# Altium PCB DIOT_Sampler 20spacin.PCBDOC (part 4 of 8)
Units mm, origin at the board's own origin, x right, y up, seen from the top; angles counter-clockwise.
Board outline 222.37 x 100 mm, 4 copper layers (Top, GP1(GND), L3, Bot), stack 1.648 mm thick; 680 components, 424 nets, 2212 pads, 808 vias.
Unrouted connection lines stored in the file: 327.
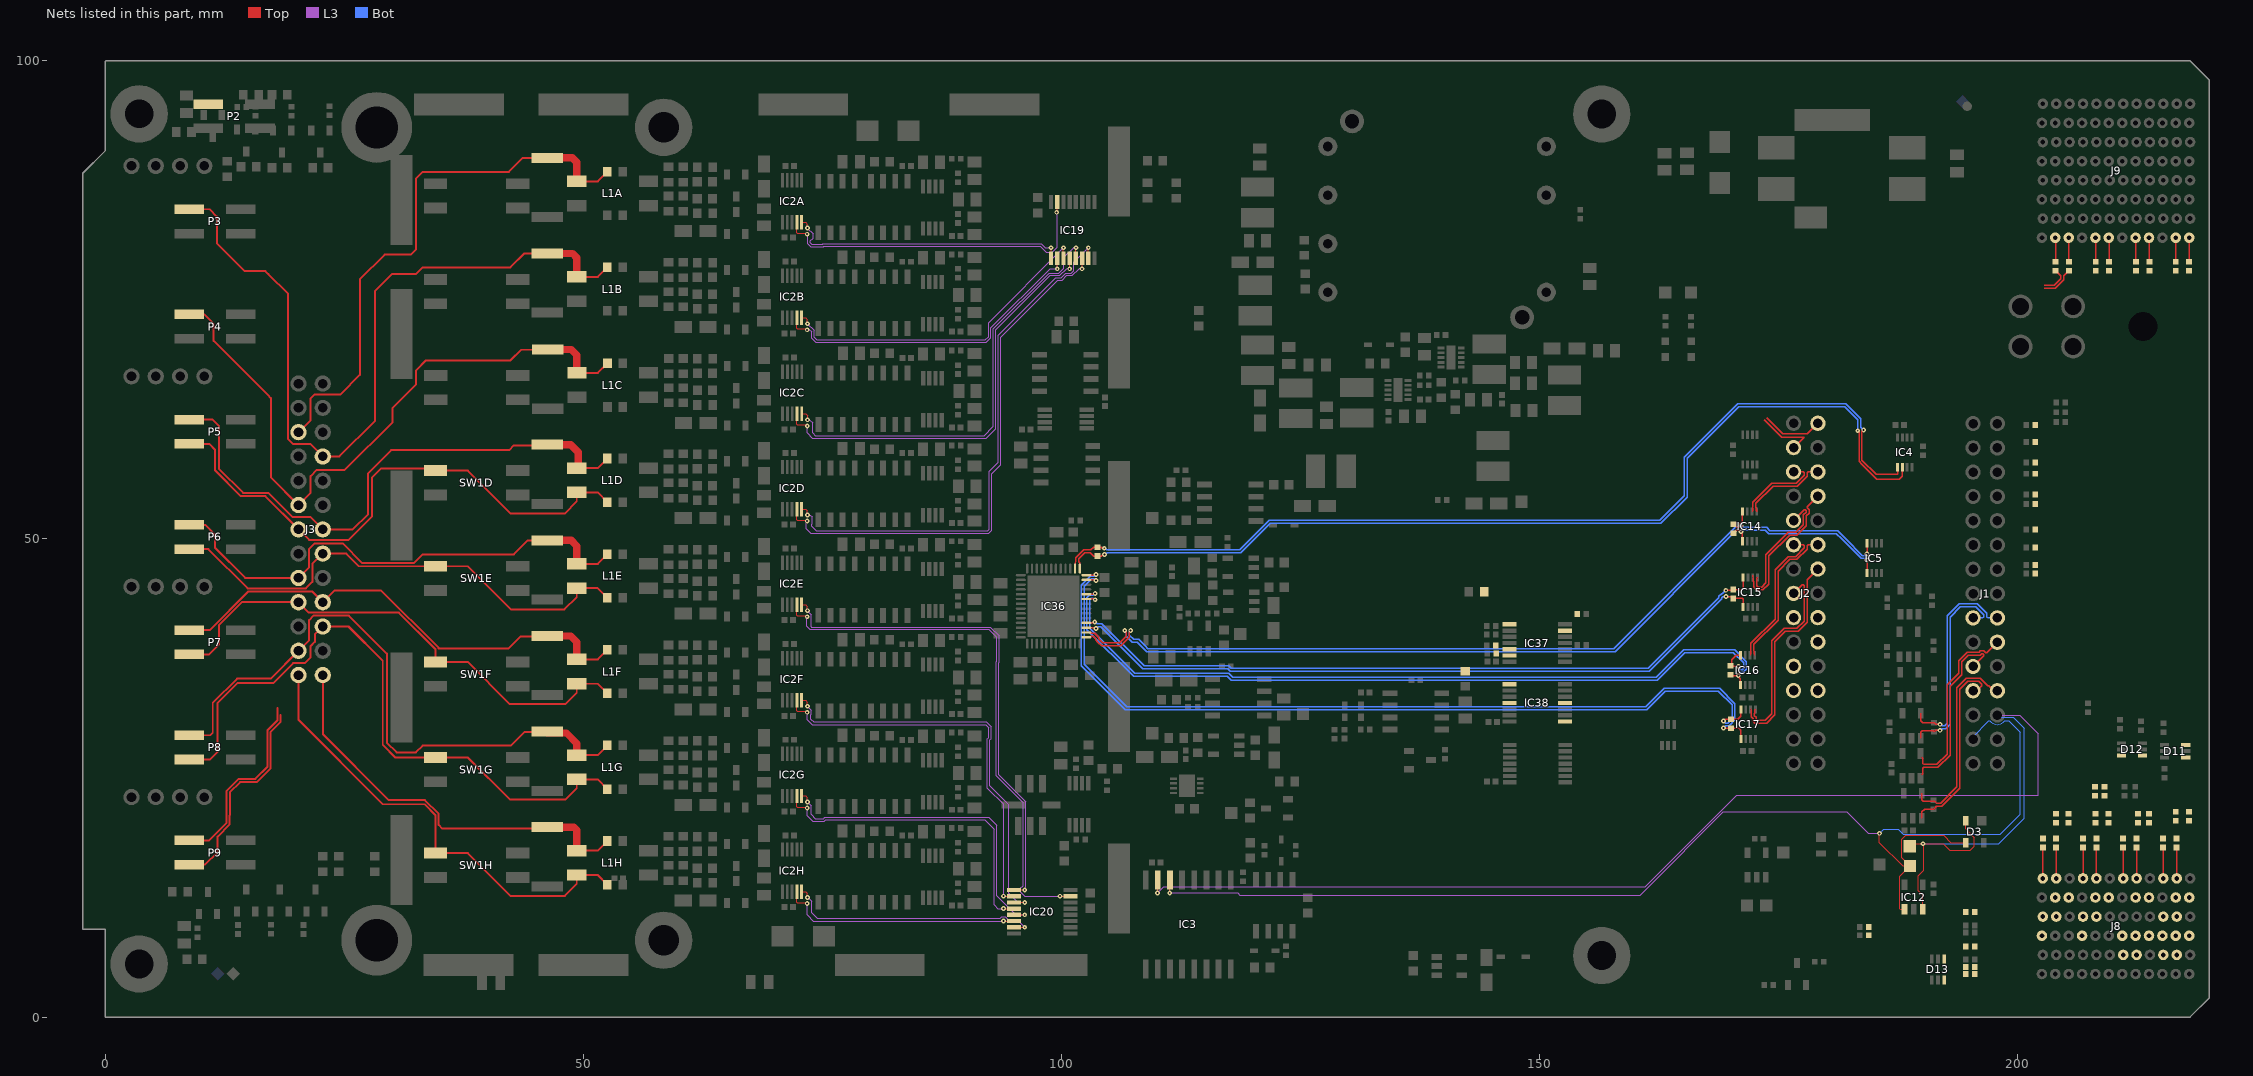
[diagram p5: the nets of this part, all layers, seen from the top]

## Via types
v1: diameter 0.5, hole 0.2, Top to Bot, tented both sides, 765 vias
v2: diameter 0.6, hole 0.3, Top to Bot, tented both sides, 17 vias
v3: diameter 0.5, hole 0.2, Top to Bot, 11 vias
v4: diameter 1, hole 0.6, Top to Bot, tented both sides, 7 vias
v5: diameter 0.6, hole 0.3, Top to Bot, 6 vias
v6: diameter 1.27, hole 0.711, Top to Bot, 2 vias

## Nets (pads, with @x,y where several pads share a name; then routed paths per layer and width w, separated by ;. In a path a pad name is that pad's centre, name@x,y a point inside that pad or via, vN(x,y) a via of type N, cw(c..) or ccw(c..) an arc to the next point about the centre after c; other vN are vias at no path point) (continued)
ADC_IN_N3: J3.14 L1D.2 P5.3 R8D.1 SW1D.1 | length 58.5
  Top w0.203: P5.3@8.8,59.93 10.9,59.93 11.5,59.33 11.5,57.165 14.192,54.473 16.757,54.473 J3.14@20.23,51 21.33,49.9 25.482,49.9 27.9,52.318 27.9,56.416 28.864,57.38 33.743,57.38 33.983,57.14 SW1D.1@34.556,57.14 37.936,57.14 42.421,52.655 48.062,52.655 49.33,53.923 L1D.2@49.33,54.854 51.518,54.854 R8D.1@52.534,53.838
ADC_IN_N4: J3.11 L1E.2 P6.3 R8E.1 SW1E.1 | length 52.3
  Top w0.203: P6.3@8.8,48.93 10.8,48.93 14.9,44.83 21.011,44.83 21.691,45.51 21.691,47.381 J3.11@22.77,48.46 25.231,48.46 26.552,47.14 SW1E.1@34.556,47.14 37.936,47.14 42.446,42.63 48.037,42.63 49.33,43.923 L1E.2@49.33,44.854 51.518,44.854 R8E.1@52.534,43.838
ADC_IN_N5: J3.8 L1F.2 P7.3 R8F.1 SW1F.1 | length 54.2
  Top w0.203: P7.3@8.8,37.93 10.9,37.93 11.9,38.93 11.9,40.974 14.306,43.38 J3.8@20.23,43.38 21.31,42.3 30.719,42.3 34.556,38.463 SW1F.1@34.556,37.14 37.936,37.14 42.346,32.73 48.137,32.73 49.33,33.923 L1F.2@49.33,34.854 51.518,34.854 R8F.1@52.534,33.838
ADC_IN_N6: J3.5 L1G.2 P8.3 R8G.1 SW1G.1 | length 68.1
  Top w0.203: P8.3@8.8,26.93 10.939,26.93 11.764,27.755 11.764,32.85 13.824,34.91 17.574,34.91 19.664,37 20.88,37 21.5,37.62 21.5,38.8 21.938,39.238 21.938,40.009 J3.5@22.77,40.84 25.46,40.84 29.039,37.261 29.039,28.455 30.354,27.14 SW1G.1@34.556,27.14 37.936,27.14 42.321,22.755 48.162,22.755 49.33,23.923 L1G.2@49.33,24.854 51.518,24.854 R8G.1@52.534,23.838
ADC_IN_N7: J3.2 L1H.2 P9.3 R8H.1 SW1H.1 | length 70.4
  Top w0.203: P9.3@8.8,15.93 10.444,15.93 11.764,17.25 11.764,18.878 13.023,20.137 13.023,21.09 13.046,21.113 13.046,23.488 14.128,24.57 15.851,24.57 17.319,26.038 17.319,29.833 18.358,30.872 18.358,31.6 ; J3.2@20.23,35.76 20.23,31.073 29.048,22.255 33.414,22.255 34.556,21.113 SW1H.1@34.556,17.14 37.936,17.14 42.396,12.68 48.087,12.68 49.33,13.923 L1H.2@49.33,14.854 51.518,14.854 R8H.1@52.534,13.838
ADC_IN_P0: J3.22 L1A.1 P2.1 R1A.1 R5A.2 | length 58.3
  Top w0.203: J3.22@20.23,61.16 21.5,62.43 21.5,64.701 21.92,65.121 24.631,65.121 26.659,67.149 26.659,77.15 29.239,79.73 31.984,79.73 32.516,80.262 32.516,87.683 33.219,88.386 42.22,88.386 43.647,89.813 46.222,89.813 R5A.2@46.264,89.855 ; L1A.1@49.33,87.394 51.531,87.394 52.417,88.28 52.417,88.293 R1A.1@52.534,88.41
  Top w0.762: R5A.2@46.264,89.855 48.864,89.855 49.33,89.389 L1A.1@49.33,87.394
ADC_IN_P1: J3.19 L1B.1 P3.1 R1B.1 R5B.2 | length 84.4
  Top w0.203: P3.1@8.8,84.47 10.934,84.47 11.699,83.705 11.699,80.921 14.606,78.013 16.762,78.013 17.092,77.683 19.151,75.623 19.151,60.43 19.651,59.93 21.46,59.93 J3.19@22.77,58.62 24.504,58.62 28.208,62.323 28.208,75.898 29.992,77.683 32.516,77.683 33.219,78.386 42.395,78.386 43.864,79.855 46.114,79.855 46.189,79.78 R5B.2@46.264,79.855 ; L1B.1@49.33,77.394 51.531,77.394 52.417,78.28 52.417,78.293 R1B.1@52.534,78.41
  Top w0.762: R5B.2@46.264,79.855 48.889,79.855 49.33,79.414 L1B.1@49.33,77.394
ADC_IN_P2: J3.16 L1C.1 P4.1 R1C.1 R5C.2 | length 70
  Top w0.203: P4.1@8.8,73.47 10.394,73.47 11.364,72.5 11.364,70.703 17.014,65.053 17.344,64.723 17.344,56.426 J3.16@20.23,53.54 21.5,54.81 21.5,56.565 22.146,57.211 23.353,57.211 25.037,57.211 25.096,57.27 25.115,57.27 30.064,62.219 30.064,63.705 32.528,66.169 32.528,67.639 33.544,68.655 42.389,68.655 43.514,69.78 46.224,69.78 46.235,69.769 R5C.2@46.277,69.811 ; L1C.1@49.343,67.35 51.543,67.35 52.43,68.236 52.43,68.249 R1C.1@52.547,68.366
  Top w0.762: R5C.2@46.277,69.811 48.758,69.811 49.339,69.23 49.339,67.354 L1C.1@49.343,67.35
ADC_IN_P3: J3.13 L1D.1 P5.1 R1D.1 R5D.2 | length 59.9
  Top w0.203: P5.1@8.8,62.47 11.249,62.47 11.9,61.819 11.9,57.34 14.43,54.81 17.081,54.81 19.591,52.3 21.47,52.3 J3.13@22.77,51 25.906,51 27.5,52.594 27.5,56.855 29.925,59.28 34.113,59.28 42.264,59.28 42.764,59.78 46.189,59.78 R5D.2@46.264,59.855 ; L1D.1@49.33,57.394 51.531,57.394 52.417,58.28 52.417,58.293 R1D.1@52.534,58.41
  Top w0.762: R5D.2@46.264,59.855 48.689,59.855 49.489,59.055 49.489,57.553 L1D.1@49.33,57.394
ADC_IN_P4: J3.10 L1E.1 P6.1 R1E.1 R5E.2 | length 53.9
  Top w0.203: P6.1@8.8,51.47 10.46,51.47 11.5,50.43 11.5,49.061 14.641,45.92 J3.10@20.23,45.92 21.309,46.999 21.309,48.909 21.938,49.539 24.84,49.539 26.909,47.47 32.303,47.47 33.219,48.386 42.745,48.386 44.214,49.855 46.18,49.855 46.222,49.813 R5E.2@46.264,49.855 ; L1E.1@49.33,47.394 51.531,47.394 52.417,48.28 52.417,48.293 R1E.1@52.534,48.41
  Top w0.762: R5E.2@46.264,49.855 48.739,49.855 49.33,49.264 L1E.1@49.33,47.394
ADC_IN_P5: J3.7 L1F.1 P7.1 R1F.1 R5F.2 | length 52
  Top w0.203: P7.1@8.8,40.47 10.929,40.47 14.959,44.5 21.65,44.5 J3.7@22.77,43.38 23.99,44.6 28.886,44.6 34.886,38.6 34.886,38.558 42.217,38.558 43.472,39.813 46.222,39.813 R5F.2@46.264,39.855 ; L1F.1@49.33,37.394 51.531,37.394 52.417,38.28 52.417,38.293 R1F.1@52.534,38.41
  Top w0.762: R5F.2@46.264,39.855 48.689,39.855 49.33,39.214 L1F.1@49.33,37.394
ADC_IN_P6: J3.4 L1G.1 P8.1 R1G.1 R5G.2 | length 66.4
  Top w0.203: P8.1@8.8,29.47 11,29.47 11.264,29.734 11.264,32.85 13.814,35.4 17.33,35.4 J3.4@20.23,38.3 21.33,39.4 21.33,41.51 21.79,41.97 25.492,41.97 29.464,37.997 29.464,28.705 30.486,27.683 32.516,27.683 33.219,28.386 42.445,28.386 43.889,29.83 46.239,29.83 R5G.2@46.264,29.855 ; L1G.1@49.464,27.394 51.531,27.394 52.417,28.28 52.417,28.293 R1G.1@52.534,28.41
  Top w0.762: R5G.2@46.239,29.693 48.249,29.693 49.33,28.611 49.33,27.528 49.464,27.394 L1G.1@49.33,27.394
ADC_IN_P7: J3.1 L1H.1 P9.1 R1H.1 R5H.2 | length 63.3
  Top w0.203: P9.1@8.8,18.47 10.889,18.47 12.693,20.274 12.693,23.601 13.992,24.9 15.714,24.9 16.989,26.175 16.989,29.97 18.028,31.009 18.028,32.3 ; J3.1@22.77,35.76 22.77,29.599 29.689,22.68 33.456,22.68 34.886,21.25 34.886,20.105 35.286,19.705 R5H.2@46.264,19.705 ; L1H.1@49.33,17.394 51.531,17.394 52.417,18.28 52.417,18.293 R1H.1@52.534,18.41
  Top w0.762: R5H.2@46.264,19.855 49.039,19.855 49.339,19.555 49.339,17.403 L1H.1@49.33,17.394
ADC_SCK_N: IC4.5 IC36.42 R79.1 | length 102.9
  Top w0.152: IC36.42@101.434,46.89 101.434,47.492 101.532,47.589 101.532,48.042 102.348,48.858 103.086,48.858 103.378,49.15 R79.1@103.764,49.15 104.15,49.15 104.281,49.019 v1(104.487,49.019) ; v1(183.9,61.4) 183.726,61.226 183.726,58.228 185.199,56.755 187.43,56.755 187.45,56.776 IC4.5@187.45,57.498
  Bot w0.152: v1(104.487,49.019) 104.581,49.019 104.744,48.856 107.329,48.856 107.35,48.877 113.092,48.877 113.114,48.856 118.656,48.856 121.73,51.93 162.574,51.93 165.134,54.49 165.134,58.534 167.705,61.105 170.735,64.135 182.051,64.135 183.605,62.581 183.605,61.661 183.758,61.507 183.758,61.4 v1(183.9,61.4)
ADC_SCK_P: IC4.6 IC36.41 R79.2 | length 103.2
  Top w0.152: IC36.41@101.934,46.89 101.934,47.492 101.836,47.589 101.836,47.915 102.474,48.553 103.035,48.553 103.378,48.21 R79.2@103.764,48.21 104.15,48.21 104.307,48.367 v1(104.514,48.367) ; v1(183.28,61.309) 183.421,61.309 183.421,61.202 183.421,58.102 183.705,57.819 185.268,56.255 187.637,56.255 187.95,56.568 IC4.6@187.95,57.498
  Bot w0.152: v1(104.514,48.367) 104.593,48.367 104.777,48.551 107.455,48.551 107.476,48.572 112.966,48.572 112.987,48.551 118.782,48.551 121.856,51.625 162.7,51.625 165.35,54.275 165.439,54.364 165.439,58.408 167.831,60.8 170.861,63.83 181.925,63.83 183.3,62.455 183.3,61.33 v1(183.28,61.309)
ADC_SDOA_N: IC5.1 IC14.1 IC36.28 R21.1 | length 94.4
  Top w0.152: IC36.28@102.609,40.215 103.035,40.215 103.133,40.118 103.489,40.118 103.896,39.711 103.896,39.568 104.334,39.13 106.09,39.13 106.789,39.829 106.789,40.23 106.628,40.391 v1(106.628,40.429) ; R21.1@170.266,50.572 R21.1@170.287,50.593 170.307,50.593 170.521,50.807 170.521,50.821 170.61,50.91 170.825,50.91 170.987,50.749 v1(171.071,50.749) ; IC14.1@171.226,49.751 v1@171.226,50.601 ; IC5.1@184.25,46.443 184.255,46.448 184.255,47.791 v1(184.26,47.796)
  Bot w0.152: v1(106.628,40.429) 106.628,40.335 106.789,40.174 106.789,39.824 107.424,39.189 107.954,39.189 108.729,38.414 108.922,38.221 157.903,38.221 170.043,50.361 170.376,50.694 170.593,50.91 170.816,50.91 170.977,50.749 v1(171.071,50.749) 171.165,50.749 171.327,50.91 173.625,50.91 173.973,50.562 181.046,50.562 181.596,50.012 183.651,47.957 184.171,47.957 184.26,47.868 v1(184.26,47.796)
ADC_SDOA_P: IC5.8 IC14.8 IC36.27 R21.2 | length 94.9
  Top w0.152: IC36.27@102.609,39.715 103.035,39.715 103.133,39.813 103.363,39.813 103.591,39.585 103.591,39.442 103.828,39.205 104.208,38.825 106.216,38.825 107.094,39.703 107.094,40.23 107.255,40.391 v1(107.255,40.429) ; R21.2@170.323,51.414 170.323,51.497 R21.2@170.287,51.533 170.307,51.533 170.521,51.319 170.521,51.305 170.61,51.215 170.825,51.215 170.987,51.376 v1(171.071,51.376) ; v1@170.952,51.533 171.226,51.806 IC14.8@171.226,52.851 ; IC5.8@184.25,49.543 184.255,49.538 184.255,48.428 v1(184.26,48.423)
  Bot w0.152: v1(107.255,40.429) 107.255,40.335 107.094,40.174 107.094,39.95 107.55,39.494 108.08,39.494 108.752,38.822 109.049,38.526 157.777,38.526 169.738,50.487 170.071,50.82 170.467,51.215 170.816,51.215 170.977,51.376 v1(171.071,51.376) 171.165,51.376 171.327,51.215 173.751,51.215 174.099,50.867 181.173,50.867 182.027,50.012 183.777,48.262 184.171,48.262 184.26,48.351 v1(184.26,48.423)
ADC_SDOB_N: IC15.8 IC36.30 R22.2 | length 75.5
  Top w0.152: IC36.30@102.609,41.215 103.538,41.215 103.494,41.259 v1(103.494,41.307) ; v1(169.491,44.62) 170.178,44.62 R22.2@170.267,44.709 171.135,44.709 171.302,44.876 IC15.8@171.302,45.976
  Bot w0.152: v1(103.494,41.307) 103.576,41.307 103.757,41.126 104.253,41.126 108.651,36.727 117.534,36.727 117.782,36.479 161.372,36.479 168.765,43.871 168.765,43.989 169.044,44.268 169.139,44.268 v1(169.491,44.62)
ADC_SDOB_P: IC15.1 IC36.29 R22.1 | length 75.1
  Top w0.152: IC36.29@102.609,40.715 103.538,40.715 v1(103.614,40.639) ; v1(169.509,43.974) 170.061,43.974 R22.1@170.267,43.769 170.274,43.776 171.202,43.776 171.302,43.676 IC15.1@171.302,42.876
  L3 w0.152: v1(103.614,40.639) v1@103.614,40.813
  Bot w0.152: v1(103.614,40.639) 103.696,40.639 103.877,40.821 104.126,40.821 108.525,36.422 117.408,36.422 117.656,36.174 125.117,36.174 161.499,36.174 169.07,43.745 169.07,43.863 169.159,43.952 169.487,43.952 v1(169.509,43.974)
ADC_SDOC_N: IC16.8 IC36.36 R23.2 | length 81.8
  Top w0.127: R23.2@169.992,36.723 R23.2@170.091,36.723
  Top w0.152: IC36.36@102.609,44.215 103.463,44.215 v1(103.539,44.292) ; v1(170.825,36.66) 170.154,36.66 170.091,36.723 170.091,37.372 170.558,37.838 IC16.8@171.016,37.838
  Bot w0.152: v1(103.539,44.292) 103.45,44.292 103.276,44.118 102.934,44.118 102.666,43.85 102.666,40.515 107.548,35.633 117.37,35.633 117.787,35.216 162.317,35.216 165.201,38.1 170.269,38.1 171.338,37.031 171.338,36.496 171.181,36.339 171.055,36.339 170.825,36.568 v1(170.825,36.66)
ADC_SDOC_P: IC16.1 IC36.35 R23.1 | length 81.1
  Top w0.152: IC36.35@102.609,43.715 103.21,43.715 103.219,43.724 103.454,43.724 v1(103.539,43.639) ; R23.1@169.992,35.783 170.063,35.713 v1(170.792,35.713) 170.792,35.618 171.016,35.394 IC16.1@171.016,34.738
  Bot w0.152: v1(103.539,43.639) 103.45,43.639 103.276,43.813 103.06,43.813 102.971,43.724 102.971,40.641 107.674,35.938 117.496,35.938 117.914,35.521 162.191,35.521 165.075,38.405 170.395,38.405 171.642,37.157 171.642,36.369 171.307,36.034 171.055,36.034 170.792,35.771 v1(170.792,35.713)
ADC_SDOD_N: IC17.8 IC36.40 R24.2 | length 88.1
  Top w0.152: IC36.40@102.609,46.215 103.558,46.215 v1(103.634,46.292) ; v1@169.313,31.041 169.399,31.127 R24.2@170.037,31.127 170.73,31.127 171.071,31.468 IC17.8@171.071,32.166
  Bot w0.152: v1(103.634,46.292) 103.545,46.292 103.371,46.118 103.029,46.118 102.082,45.171 102.082,36.752 106.701,32.133 161.234,32.133 163.161,34.059 168.707,34.059 170.134,32.632 170.134,31.212 169.874,30.952 169.874,30.925 169.694,30.745 169.503,30.745 169.28,30.968 v1(169.24,30.968)
ADC_SDOD_P: IC17.1 IC36.39 R24.1 | length 88.3
  Top w0.127: v1(169.24,30.218) v1@169.271,30.187
  Top w0.152: IC36.39@102.609,45.715 103.558,45.715 v1(103.634,45.639) ; v1@169.271,30.187 R24.1@170.037,30.187 170.9,30.187 171.071,30.016 IC17.1@171.071,29.066
  Bot w0.152: v1(103.634,45.639) 103.545,45.639 103.371,45.813 103.155,45.813 102.387,45.045 102.387,36.878 106.827,32.438 161.108,32.438 162.945,34.275 163.034,34.364 168.833,34.364 170.439,32.759 170.439,31.086 170.179,30.825 170.179,30.799 169.82,30.441 169.503,30.441 169.28,30.218 v1(169.24,30.218)
BGA0: D13.3 J8.C3 R90.2
BGA1: D12.1 J8.F3 R91.2
BGA2: D12.6 J8.I3 R94.2
BGA3: D13.4 J8.L3 R99.2
BP_I2C.SCL: D11.3 IC38.8 IC38.11 J8.B2 R121.1
BP_I2C.SDA: D11.1 IC38.1 IC38.4 J8.C2 R120.1
BP_IO.LVDS_N0: J8.E3 R138.1
BP_IO.LVDS_N1: J8.B3 R139.1
BP_IO.LVDS_N2: J8.C4 R140.1
BP_IO.LVDS_N3: J8.L4 R141.1
BP_IO.LVDS_N4: J8.I4 R142.1
BP_IO.LVDS_N5: J8.K5 R143.1
BP_IO.LVDS_N6: J8.H5 R144.1
BP_IO.LVDS_N7: J8.F6 R145.1 | length 3.2
  Top w0.152: J8.F6@211.039,14.5 R145.1@211.039,17.73
BP_IO.LVDS_N8: J8.C6 R146.1 | length 3.2
  Top w0.152: J8.C6@215.239,14.5 R146.1@215.239,17.691
BP_IO.LVDS_N9: J8.L6 R147.1 | length 3.2
  Top w0.152: J8.L6@202.639,14.5 R147.1@202.639,17.73
BP_IO.LVDS_N10: J8.I6 R148.1 | length 3.2
  Top w0.152: J8.I6@206.839,14.5 R148.1@206.839,17.73
BP_IO.LVDS_N11: J9.E1 R149.1 | length 2.5
  Top w0.152: J9.E1@212.339,81.5 212.37,81.469 R149.1@212.37,78.98
BP_IO.LVDS_N12: J9.B1 R150.1 | length 2.5
  Top w0.152: R150.1@216.539,78.98 J9.B1@216.539,81.5
BP_IO.LVDS_N13: J9.K1 R151.1 | length 2.5
  Top w0.152: J9.K1@203.939,81.5 203.97,81.469 R151.1@203.97,78.98
BP_IO.LVDS_N14: J9.H1 R152.1 | length 2.5
  Top w0.152: J9.H1@208.139,81.5 208.17,81.469 R152.1@208.17,78.98
BP_IO.LVDS_N15: J8.F2 R153.1
BP_IO.LVDS_P0: J8.D3 R122.1
BP_IO.LVDS_P1: J8.A3 R123.1
BP_IO.LVDS_P2: J8.B4 R124.1
BP_IO.LVDS_P3: J8.K4 R125.1
BP_IO.LVDS_P4: J8.H4 R126.1
BP_IO.LVDS_P5: J8.J5 R127.1
BP_IO.LVDS_P6: J8.G5 R128.1
BP_IO.LVDS_P7: J8.E6 R129.1 | length 3.2
  Top w0.152: J8.E6@212.439,14.5 R129.1@212.439,17.73
BP_IO.LVDS_P8: J8.B6 R130.1 | length 3.2
  Top w0.152: J8.B6@216.639,14.5 R130.1@216.639,17.691
BP_IO.LVDS_P9: J8.K6 R131.1 | length 3.2
  Top w0.152: J8.K6@204.039,14.5 R131.1@204.039,17.73
BP_IO.LVDS_P10: J8.H6 R132.1 | length 3.2
  Top w0.152: J8.H6@208.239,14.5 R132.1@208.239,17.73
BP_IO.LVDS_P11: J9.D1 R133.1 | length 2.5
  Top w0.152: J9.D1@213.739,81.5 213.77,81.469 R133.1@213.77,78.98
BP_IO.LVDS_P12: J9.A1 R134.1 | length 2.5
  Top w0.152: R134.1@217.939,78.98 J9.A1@217.939,81.5
BP_IO.LVDS_P13: J9.J1 R135.1 | length 2.5
  Top w0.152: J9.J1@205.339,81.5 205.339,79.011 R135.1@205.37,78.98
BP_IO.LVDS_P14: J9.G1 R136.1 | length 2.5
  Top w0.152: J9.G1@209.539,81.5 209.57,81.469 R136.1@209.57,78.98
BP_IO.LVDS_P15: J8.E2 R137.1
BP_MGT.Rx_N: R89.1
BP_MGT.Rx_P: R87.1
BP_MGT.Tx_N: R85.1
BP_MGT.Tx_P: R84.1
BP_MGT_Rx_N: J8.E5 R89.2
BP_MGT_Rx_P: J8.D5 R87.2
BP_MGT_Tx_N: J8.B5 R85.2
BP_MGT_Tx_P: J8.A5 R84.2
CH0_A0: IC2A.4 IC19.15 | length 35.2
  Top w0.127: IC2A.4@72.345,83.117 72.345,82.008 72.395,81.958 73.324,81.958 v1(73.42,81.862) ; IC19.15@99.497,85.17 IC19.15@99.574,85.247 99.574,84.207 v1(99.514,84.147)
  L3 w0.127: v1(73.42,81.862) 73.504,81.947 73.504,81.28 73.489,81.265 73.489,80.852 73.781,80.56 75.143,80.56 75.178,80.596 97.799,80.596 98.414,79.98 98.947,79.98 98.975,80.009 99.106,80.009 99.574,80.476 99.574,84.207 v1(99.514,84.147)
CH0_A1: IC2A.5 IC19.1 | length 29.5
  Top w0.127: IC2A.5@72.845,83.117 73.258,83.117 73.445,82.929 v1(73.445,82.497) ; IC19.1@98.924,79.347 v1(98.924,80.449)
  L3 w0.127: v1(73.445,82.497) 74.039,81.904 74.039,81.455 73.743,81.159 73.743,80.957 73.886,80.814 75.038,80.814 75.073,80.85 97.904,80.85 98.304,80.449 v1(98.924,80.449)
CH1_A0: IC2B.4 IC19.2 | length 34.3
  Top w0.127: IC2B.4@72.345,73.117 72.345,72.008 72.395,71.958 73.324,71.958 v1(73.42,71.862) ; v1(99.574,78.245) IC19.2@99.574,79.347
  L3 w0.127: v1(73.42,71.862) 73.504,71.947 73.613,71.947 73.885,71.675 73.885,70.975 74.309,70.551 92.169,70.551 92.643,71.025 92.643,72.068 98.82,78.245 v1(99.574,78.245)
CH1_A1: IC2B.5 IC19.3 | length 35
  Top w0.127: IC2B.5@72.845,73.117 73.258,73.117 73.445,72.929 v1(73.445,72.497) ; IC19.3@100.224,79.347 v1(100.224,80.449)
  L3 w0.127: v1(73.445,72.497) 74.139,71.804 74.139,71.08 74.414,70.805 92.064,70.805 92.389,71.13 92.389,72.615 v1(100.224,80.449)
CH2_A0: IC2C.4 IC19.4 | length 45.3
  Top w0.127: IC2C.4@72.358,63.073 72.358,61.964 72.408,61.914 73.337,61.914 v1(73.433,61.819) ; v1(100.874,78.245) IC19.4@100.874,79.347
  L3 w0.127: v1@73.517,61.903 v1(73.433,61.819) 73.433,61.086 73.968,60.551 92.16,60.551 93.151,61.542 93.151,71.858 98.844,77.551 99.861,77.551 100.576,78.266 100.853,78.266 100.874,78.287 v1(100.874,78.245)
CH2_A1: IC2C.5 IC19.5 | length 46.3
  Top w0.127: IC2C.5@72.858,63.073 73.27,63.073 73.458,62.885 v1(73.458,62.454) ; IC19.5@101.524,79.347 v1(101.524,80.449)
  L3 w0.127: v1(73.458,62.454) 73.665,62.454 73.989,62.13 73.989,61.08 74.264,60.805 91.939,60.805 92.897,61.763 92.897,71.963 98.739,77.805 99.756,77.805 100.264,78.313 100.264,79.43 101.283,80.449 v1(101.524,80.449)
CH3_A0: IC2D.4 IC19.6 | length 56
  Top w0.127: IC2D.4@72.345,53.117 72.345,52.008 72.395,51.958 73.324,51.958 v1(73.42,51.862) ; v1(102.174,78.245) IC19.6@102.174,79.347
  L3 w0.127: v1@73.504,51.947 v1(73.42,51.862) 73.339,51.781 73.339,51.08 73.818,50.601 92.393,50.601 92.722,50.93 92.722,56.813 93.659,57.75 93.659,71.075 99.627,77.043 100.072,77.043 100.58,77.551 101.161,77.551 101.856,78.245 v1(102.174,78.245)
CH3_A1: IC2D.5 IC19.7 | length 57
  Top w0.127: IC2D.5@72.845,53.117 73.258,53.117 73.445,52.929 v1(73.445,52.497) ; IC19.7@102.824,79.347 v1(102.824,80.449)
  L3 w0.127: v1(73.445,52.497) 73.747,52.497 73.939,52.305 73.939,51.58 73.914,51.555 73.914,51.305 74.364,50.855 92.288,50.855 92.468,51.035 92.468,57.063 93.405,58 93.405,71.296 99.406,77.297 99.966,77.297 100.474,77.805 101.056,77.805 101.314,78.063 101.314,78.94 v1(102.824,80.449)
CH4_A0: IC2E.4 IC20.15 | length 57.1
  Top w0.127: IC2E.4@72.345,43.117 72.345,42.008 72.395,41.958 73.324,41.958 v1(73.42,41.862) ; v1(99.867,12.637) IC20.15@100.969,12.637
  L3 w0.127: v1@73.504,41.947 v1(73.42,41.862) 73.364,41.806 73.364,40.855 73.689,40.53 92.414,40.53 93.239,39.705 93.239,37.187 93.22,37.168 93.22,25.225 96.014,22.43 96.014,14.898 96.006,14.89 96.006,13.745 95.73,13.469 95.73,13.104 96.198,12.637 v1(99.867,12.637)
CH4_A1: IC2E.5 IC20.1 | length 51.9
  Top w0.127: IC2E.5@72.845,43.117 73.258,43.117 73.445,42.929 v1(73.445,42.497) ; IC20.1@95.069,13.287 v1(96.171,13.287)
  L3 w0.127: v1(73.445,42.497) 73.861,42.082 73.861,40.799 73.875,40.784 92.585,40.784 93.493,39.876 93.493,37.082 93.474,37.062 93.474,25.33 96.268,22.535 96.268,14.793 96.26,14.785 96.26,13.376 v1(96.171,13.287)
CH5_A0: IC2F.4 IC20.2 | length 42
  Top w0.127: IC2F.4@72.345,33.117 72.345,32.008 72.395,31.958 73.324,31.958 v1(73.42,31.862) ; v1(93.967,12.637) IC20.2@95.069,12.637
  L3 w0.127: v1@73.504,31.947 v1(73.42,31.862) 73.42,31.074 73.939,30.555 92.089,30.555 92.405,30.24 92.405,29.223 92.264,29.082 92.264,23.93 93.967,22.227 v1(93.967,12.637)
CH5_A1: IC2F.5 IC20.3 | length 43.3
  Top w0.127: IC2F.5@72.845,33.117 73.258,33.117 73.445,32.929 v1(73.445,32.497) ; IC20.3@95.069,11.987 v1(96.171,11.987)
  L3 w0.127: v1(73.445,32.497) 73.861,32.082 73.861,31.68 73.814,31.633 73.814,31.155 74.114,30.855 92.148,30.855 92.659,30.345 92.659,29.117 92.518,28.977 92.518,24.176 94.514,22.18 94.514,12.93 95.457,11.987 v1(96.171,11.987)
CH6_A0: IC2G.4 IC20.4 | length 33.6
  Top w0.127: IC2G.4@72.345,23.117 72.345,22.008 72.395,21.958 73.324,21.958 v1(73.42,21.862) ; v1(93.967,11.337) IC20.4@95.069,11.337
  L3 w0.127: v1@73.504,21.947 v1(73.42,21.862) 73.42,21.049 73.989,20.48 75.219,20.48 75.36,20.621 91.973,20.621 92.964,19.63 92.964,11.733 93.361,11.337 v1(93.967,11.337)
CH6_A1: IC2G.5 IC20.5 | length 34.8
  Top w0.127: IC2G.5@72.845,23.117 73.258,23.117 73.445,22.929 v1(73.445,22.497) ; IC20.5@95.069,10.687 v1(96.171,10.687)
  L3 w0.127: v1(73.445,22.497) 73.861,22.082 73.861,21.184 74.289,20.755 75.135,20.755 75.255,20.875 92.419,20.875 93.23,20.064 93.23,12.696 95.24,10.687 v1(96.171,10.687)
CH7_A0: IC2H.4 IC20.6 | length 25.4
  Top w0.127: IC2H.4@72.345,13.117 72.345,12.008 72.395,11.958 73.324,11.958 v1(73.42,11.862) ; v1(93.967,10.037) IC20.6@95.069,10.037
  L3 w0.127: v1@73.504,11.947 v1(73.42,11.862) 73.42,10.699 74.082,10.037 v1(93.967,10.037)
CH7_A1: IC2H.5 IC20.7 | length 27.1
  Top w0.127: IC2H.5@72.845,13.117 73.258,13.117 73.445,12.929 v1(73.445,12.497) ; IC20.7@95.069,9.387 v1(96.171,9.387)
  L3 w0.127: v1(73.445,12.497) 73.522,12.497 73.889,12.13 73.889,10.88 74.464,10.305 93.612,10.305 93.784,10.477 94.149,10.477 94.696,9.93 95.627,9.93 v1(96.171,9.387)
EEM0_I2C.SCL: D18.1 IC40.2 IC42.6 IC43.6 IC46.1 J1.27
EEM0_I2C.SCL: D3.3 IC3.14 IC12.1 TP2.1 | length 132
  Top w0.127: v1(111.339,12.98) 111.359,13 IC3.14@111.359,14.33 ; v1(185.552,19.213) 185.552,18.225 187.978,15.799 TP2.1@188.447,15.799 ; IC12.1@188.177,11.252 187.76,11.252 187.686,11.326 187.686,14.739 TP2.1@188.747,15.799 187.896,16.65 187.896,18.571 188.311,18.986 192.268,18.986 193.029,18.225 D3.3@194.571,18.225
  L3 w0.127: v1(111.339,12.98) 118.436,12.98 118.677,12.74 160.529,12.74 161.156,13.367 169.241,21.452 182.132,21.452 184.371,19.213 v1(185.552,19.213)
  Bot w0.127: v1(185.552,19.213) 185.993,19.654 187.51,19.654 188.058,19.106 198.172,19.106 200.278,21.212 200.278,29.773 199.087,30.964 198.664,30.964 198.627,30.926 198.624,30.924 cw(c197.882,31.58) 197.141,30.924 197.138,30.926 197.101,30.964 196.975,30.964 195.342,29.331 195.342,29.04
EEM0_I2C.SDA: D18.3 IC40.1 IC42.5 IC43.5 IC46.4 J1.26
EEM0_I2C.SDA: D3.2 IC3.15 IC12.3 TP1.1 | length 151.6
  Top w0.127: v1(110.064,12.98) 110.089,13.005 IC3.15@110.089,14.33 ; TP1.1@188.621,18.057 188.621,18.108 v1@190.104,18.108 ; IC12.3@190.077,11.252 190.077,12.732 189.586,13.223 189.586,14.751 190.208,15.374 190.208,18.017 v1(190.104,18.121) 192.23,18.121 192.9,17.45 195.063,17.45 195.469,17.857 195.469,18.77 194.571,19.669 D3.2@194.571,20.525
  L3 w0.127: v1(110.064,12.98) 110.705,13.621 161.05,13.621 170.637,23.207 202.15,23.207 202.15,29.645 200.215,31.58 197.882,31.58
  Bot w0.127: v1(190.104,18.121) 198.017,18.121 200.703,20.807 200.703,30.187 199.528,31.362 198.101,31.362 197.882,31.58 197.751,31.449
EEM_IO.LVDS_N5: J1.18 R143.2 | length 21.7
  Top w0.152: 189.862,31.746 189.862,30.964 190.054,30.771 191.256,30.771 191.261,30.766 191.418,30.61 v1(191.888,30.61)
  Bot w0.152: v1(191.888,30.61) 191.982,30.61 192.143,30.449 192.366,30.449 192.654,30.736 192.654,41.953 193.899,43.198 195.77,43.198 196.765,42.204 196.765,41.83 196.854,41.74 J1.18@197.882,41.74
EEM_IO.LVDS_N6: J1.21 R144.2 | length 18.8
  Top w0.152: 189.971,25.329 190.074,25.433 190.074,26.017 190.163,26.107 191.672,26.107 192.938,27.372 192.938,34.596 194.156,35.814 194.156,37.154 194.84,37.838 196.089,37.838 196.226,37.975 196.352,37.975 196.442,37.886 196.442,37.76 J1.21@195.342,36.66
EEM_IO.LVDS_N7: J1.24 R145.2 | length 20.7
  Top w0.152: 189.985,23.386 189.985,22.741 190.154,22.571 191.321,22.571 191.424,22.468 191.424,22.454 191.513,22.364 191.939,22.364 193.645,24.07 193.645,34.409 194.652,35.416 196.09,35.416 196.854,34.652 196.959,34.652 197.491,34.12 J1.24@197.882,34.12
EEM_IO.LVDS_N8: J2.3 R146.2 | length 6.5
  Top w0.152: 173.527,62.478 175.361,60.645 177.671,60.645 J2.3@176.572,59.546
EEM_IO.LVDS_N9: J2.6 R147.2 | length 9.2
  Top w0.152: 172.726,53.085 172.726,52.851 172.652,52.925 172.652,53.265 172.628,53.289 172.628,53.708 174.432,55.512 176.964,55.512 177.994,56.543 177.994,56.917 178.083,57.006 J2.6@179.112,57.006
EEM_IO.LVDS_N10: J2.9 R148.2 | length 13.6
  Top w0.152: 172.802,45.976 172.728,45.902 172.728,45.562 172.705,45.538 172.705,45.322 172.705,45.12 172.862,44.962 173.227,44.962 173.675,45.41 173.675,48.339 176.03,50.694 176.794,50.694 177.6,51.5 177.6,52.523 177.886,52.809 177.886,52.936 177.797,53.025 177.671,53.025 J2.9@176.572,51.926
EEM_IO.LVDS_N11: J2.12 R149.2 | length 15.4
  Top w0.152: 172.516,37.838 172.443,37.912 172.443,38.252 172.419,38.276 172.419,38.964 174.949,41.494 174.949,46.642 176.156,47.849 176.921,47.849 177.994,48.923 177.994,49.297 178.083,49.386 J2.12@179.112,49.386
EEM_IO.LVDS_N12: J2.15 R150.2 | length 20.3
  Top w0.152: 172.619,32.118 172.571,32.166 172.498,32.092 172.498,31.751 172.474,31.728 172.474,31.512 172.643,31.343 172.643,31.13 172.732,31.041 173.626,31.041 174.306,31.721 174.306,39.368 175.579,40.641 176.921,40.641 177.689,41.41 177.689,45.119 177.6,45.208 177.474,45.208 J2.15@176.572,44.306
EEM_IO.LVDS_N13: J2.18 R151.2 | length 3.1
  Top w0.152: 202.8,76.5 203.818,76.5 204.518,77.2 204.518,77.492 R151.2@203.97,78.04
EEM_IO.LVDS_N14: J2.21 R152.2
EEM_IO.LVDS_N15: J2.24 R153.2
EEM_IO.LVDS_P5: J1.17 R127.2 | length 21.1
  Top w0.152: 189.862,29.146 189.862,29.779 190.004,29.921 191.166,29.921 191.261,29.826 191.418,29.983 v1(191.888,29.983)
  Bot w0.152: v1(191.888,29.983) 191.982,29.983 192.143,30.144 192.493,30.144 192.959,30.61 192.959,41.827 194.026,42.893 195.644,42.893 196.46,42.077 196.46,41.83 196.371,41.74 J1.17@195.342,41.74
EEM_IO.LVDS_P6: J1.20 R128.2 | length 19
  Top w0.152: 189.971,27.189 190.074,27.085 190.074,26.501 190.163,26.411 191.546,26.411 192.633,27.499 192.633,34.723 193.851,35.94 193.851,37.281 194.713,38.143 195.963,38.143 196.1,38.28 196.478,38.28 196.657,38.101 196.783,38.101 J1.20@197.882,39.2
EEM_IO.LVDS_P7: J1.23 R129.2 | length 20.1
  Top w0.152: 189.985,20.786 189.985,21.452 190.275,21.742 191.19,21.742 191.21,21.742 191.424,21.956 191.424,21.97 191.513,22.06 192.066,22.06 193.95,23.944 193.95,34.282 194.778,35.111 195.933,35.111 196.266,34.778 196.266,34.652 195.734,34.12 J1.23@195.342,34.12
EEM_IO.LVDS_P8: J2.2 R130.2 | length 6.5
  Top w0.152: 173.743,62.694 175.45,60.987 178.013,60.987 J2.2@179.112,62.086
EEM_IO.LVDS_P9: J2.5 R131.2 | length 9
  Top w0.152: 172.226,52.851 172.299,52.925 172.299,53.265 172.323,53.289 172.323,53.834 174.306,55.817 176.837,55.817 177.689,56.669 177.689,56.917 177.6,57.006 J2.5@176.572,57.006
EEM_IO.LVDS_P10: J2.8 R132.2 | length 15.1
  Top w0.152: 172.302,46.183 172.302,45.976 172.376,45.902 172.376,45.562 172.4,45.538 172.4,45.196 172.4,44.993 172.736,44.657 173.353,44.657 173.98,45.283 173.98,48.212 176.156,50.389 176.921,50.389 177.905,51.374 177.905,52.397 178.191,52.683 178.191,53.062 178.013,53.24 178.013,53.367 J2.8@179.112,54.466
EEM_IO.LVDS_P11: J2.11 R133.2 | length 15.4
  Top w0.152: 172.016,37.838 172.09,37.912 172.09,38.252 172.114,38.276 172.114,39.09 174.645,41.62 174.645,46.768 176.03,48.154 176.794,48.154 177.689,49.049 177.689,49.297 177.6,49.386 J2.11@176.572,49.386
EEM_IO.LVDS_P12: J2.14 R134.2 | length 22
  Top w0.152: 172.071,32.252 172.071,32.166 172.145,32.092 172.145,31.751 172.169,31.728 172.169,31.386 172.338,31.217 172.338,30.923 172.387,30.874 172.526,30.736 173.752,30.736 174.611,31.595 174.611,39.242 175.705,40.337 177.047,40.337 177.994,41.284 177.994,45.728 J2.14@179.112,46.846
EEM_IO.LVDS_P13: J2.17 R135.2 | length 3.6
  Top w0.152: 202.8,76.195 203.944,76.195 204.822,77.074 204.822,77.492 R135.2@205.37,78.04
EEM_IO.LVDS_P14: J2.20 R136.2
EEM_IO.LVDS_P15: J2.23 R137.2
GA0: IC37.6 IC37.8 R90.1 R108.1 R109.2 R112.1
GA1: IC37.12 R91.1 R107.2
GA2: IC37.13 R94.1 R104.2
GA3: R99.1